# EAGLE board Load_Cape (EAGLE 7.7.0)
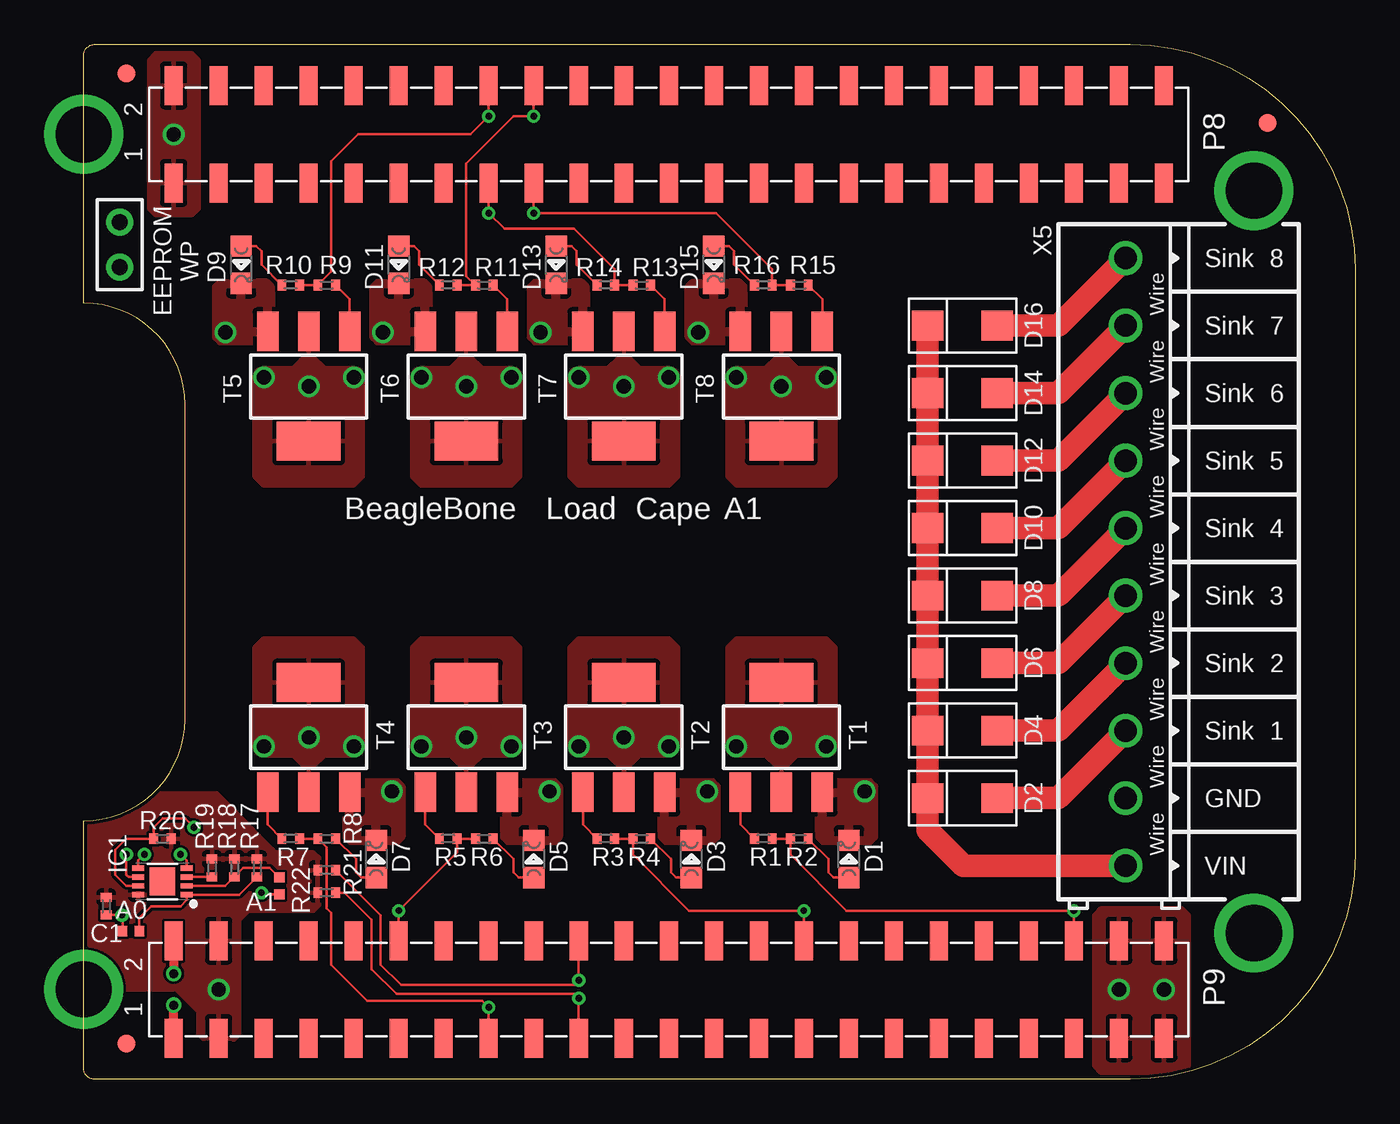
[diagram p0: board, top side]
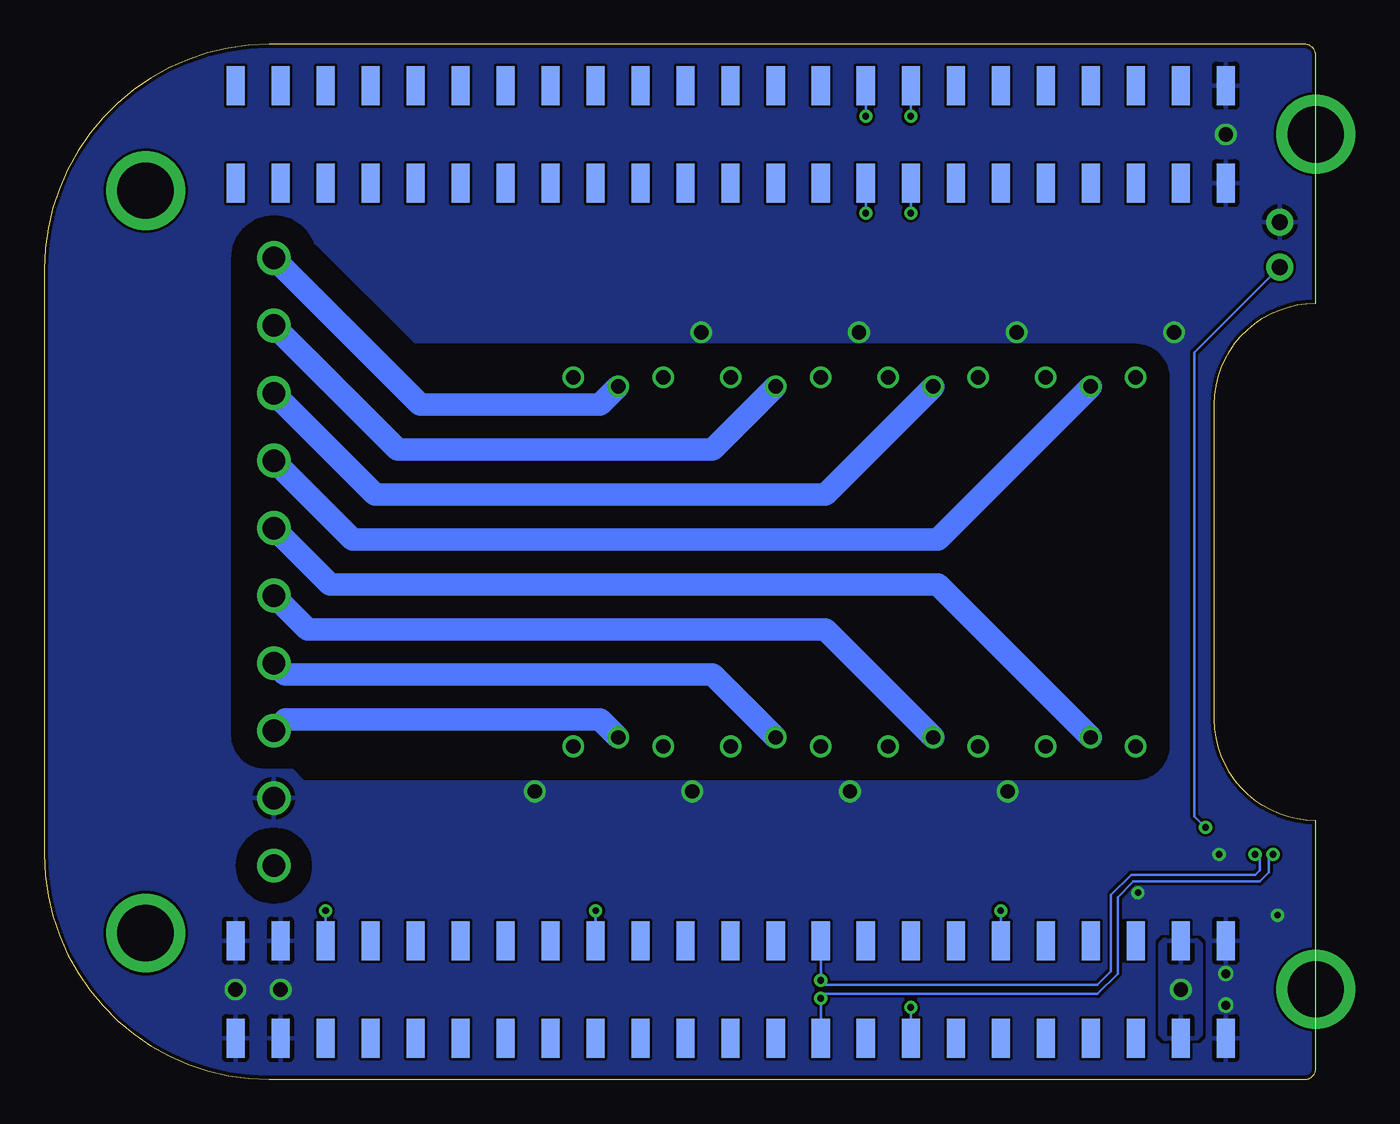
[diagram p1: board, bottom side, seen from below]

Size 71.75 x 58.42 mm. Coordinates in mm from the lower left corner, seen from the top.
Copper layers (1+16): Top 0.035mm / dielectric 1.5mm / Bottom 0.035mm
Design rules "SparkFun-2-layer *": minimum track width 6mil, minimum drill 15mil, track to track 6mil, track to pad 6mil, pad to pad 6mil, via to via 6mil, smd to smd 6mil, copper to edge 8mil, drill to drill 8mil, minimum pad ring 12mil, minimum via ring 7mil, stop-mask expansion 4mil, vias tented up to drill 32mil, thermal gap 10mil
tRestrict: 4 lines

## Footprints (pad centres in the part's own frame; a part is rotated, then mirrored left to right if it is on the bottom)
BEAGLEBONE.CAPE.TOP/BOTTOM-PADS = smd 1.02 x 2.2 bottom: B8.1 5.08,50.59; B8.2 5.08,56.09; B8.3 7.62,50.59; B8.4 7.62,56.09; B8.5 10.16,50.59; B8.6 10.16,56.09; B8.7 12.7,50.59; B8.8 12.7,56.09; B8.9 15.24,50.59; B8.10 15.24,56.09; B8.11 17.78,50.59; B8.12 17.78,56.09; B8.13 20.32,50.59; B8.14 20.32,56.09; B8.15 22.86,50.59; B8.16 22.86,56.09; B8.17 25.4,50.59; B8.18 25.4,56.09; B8.19 27.94,50.59; B8.20 27.94,56.09; B8.21 30.48,50.59; B8.22 30.48,56.09; B8.23 33.02,50.59; B8.24 33.02,56.09; B8.25 35.56,50.59; B8.26 35.56,56.09; B8.27 38.1,50.59; B8.28 38.1,56.09; B8.29 40.64,50.59; B8.30 40.64,56.09; B8.31 43.18,50.59; B8.32 43.18,56.09; B8.33 45.72,50.59; B8.34 45.72,56.09; B8.35 48.26,50.59; B8.36 48.26,56.09; B8.37 50.8,50.59; B8.38 50.8,56.09; B8.39 53.34,50.59; B8.40 53.34,56.09; B8.41 55.88,50.59; B8.42 55.88,56.09; B8.43 58.42,50.59; B8.44 58.42,56.09; B8.45 60.96,50.59; B8.46 60.96,56.09; B9.1 5.08,2.33; B9.2 5.08,7.83; B9.3 7.62,2.33; B9.4 7.62,7.83; B9.5 10.16,2.33; B9.6 10.16,7.83; B9.7 12.7,2.33; B9.8 12.7,7.83; B9.9 15.24,2.33; B9.10 15.24,7.83; B9.11 17.78,2.33; B9.12 17.78,7.83; B9.13 20.32,2.33; B9.14 20.32,7.83; B9.15 22.86,2.33; B9.16 22.86,7.83; B9.17 25.4,2.33; B9.18 25.4,7.83; B9.19 27.94,2.33; B9.20 27.94,7.83; B9.21 30.48,2.33; B9.22 30.48,7.83; B9.23 33.02,2.33; B9.24 33.02,7.83; B9.25 35.56,2.33; B9.26 35.56,7.83; B9.27 38.1,2.33; B9.28 38.1,7.83; B9.29 40.64,2.33; B9.30 40.64,7.83; B9.31 43.18,2.33; B9.32 43.18,7.83; B9.33 45.72,2.33; B9.34 45.72,7.83; B9.35 48.26,2.33; B9.36 48.26,7.83; B9.37 50.8,2.33; B9.38 50.8,7.83; B9.39 53.34,2.33; B9.40 53.34,7.83; B9.41 55.88,2.33; B9.42 55.88,7.83; B9.43 58.42,2.33; B9.44 58.42,7.83; B9.45 60.96,2.33; B9.46 60.96,7.83 | drill 3.175 pad 4.445: MH.1 0,5.08; MH.2 66.04,8.255; MH.3 66.04,50.165; MH.4 0,53.34 | smd 1.02 x 2.2: T8.1 5.08,50.59; T8.2 5.08,56.09; T8.3 7.62,50.59; T8.4 7.62,56.09; T8.5 10.16,50.59; T8.6 10.16,56.09; T8.7 12.7,50.59; T8.8 12.7,56.09; T8.9 15.24,50.59; T8.10 15.24,56.09; T8.11 17.78,50.59; T8.12 17.78,56.09; T8.13 20.32,50.59; T8.14 20.32,56.09; T8.15 22.86,50.59; T8.16 22.86,56.09; T8.17 25.4,50.59; T8.18 25.4,56.09; T8.19 27.94,50.59; T8.20 27.94,56.09; T8.21 30.48,50.59; T8.22 30.48,56.09; T8.23 33.02,50.59; T8.24 33.02,56.09; T8.25 35.56,50.59; T8.26 35.56,56.09; T8.27 38.1,50.59; T8.28 38.1,56.09; T8.29 40.64,50.59; T8.30 40.64,56.09; T8.31 43.18,50.59; T8.32 43.18,56.09; T8.33 45.72,50.59; T8.34 45.72,56.09; T8.35 48.26,50.59; T8.36 48.26,56.09; T8.37 50.8,50.59; T8.38 50.8,56.09; T8.39 53.34,50.59; T8.40 53.34,56.09; T8.41 55.88,50.59; T8.42 55.88,56.09; T8.43 58.42,50.59; T8.44 58.42,56.09; T8.45 60.96,50.59; T8.46 60.96,56.09; T9.1 5.08,2.33; T9.2 5.08,7.83; T9.3 7.62,2.33; T9.4 7.62,7.83; T9.5 10.16,2.33; T9.6 10.16,7.83; T9.7 12.7,2.33; T9.8 12.7,7.83; T9.9 15.24,2.33; T9.10 15.24,7.83; T9.11 17.78,2.33; T9.12 17.78,7.83; T9.13 20.32,2.33; T9.14 20.32,7.83; T9.15 22.86,2.33; T9.16 22.86,7.83; T9.17 25.4,2.33; T9.18 25.4,7.83; T9.19 27.94,2.33; T9.20 27.94,7.83; T9.21 30.48,2.33; T9.22 30.48,7.83; T9.23 33.02,2.33; T9.24 33.02,7.83; T9.25 35.56,2.33; T9.26 35.56,7.83; T9.27 38.1,2.33; T9.28 38.1,7.83; T9.29 40.64,2.33; T9.30 40.64,7.83; T9.31 43.18,2.33; T9.32 43.18,7.83; T9.33 45.72,2.33; T9.34 45.72,7.83; T9.35 48.26,2.33; T9.36 48.26,7.83; T9.37 50.8,2.33; T9.38 50.8,7.83; T9.39 53.34,2.33; T9.40 53.34,7.83; T9.41 55.88,2.33; T9.42 55.88,7.83; T9.43 58.42,2.33; T9.44 58.42,7.83; T9.45 60.96,2.33; T9.46 60.96,7.83
0402 = smd 0.5 x 0.6: 1 -0.5,0; 2 0.5,0
0805-LED = smd 1.2 x 1.2: A 0,1.05; K 0,-1.05
DIODE_SMA = smd 1.778 x 1.676: A -1.905,0; K 2.032,0
FIDUCIAL_40MIL = smd 1.016 x 1.016: P$1 0,0
UDFN8,2X3(ON-SEMI) = smd 0.3 x 0.68: 1 0.75,1.36; 2 0.25,1.36; 3 -0.25,1.36; 4 -0.75,1.36; 5 -0.75,-1.36; 6 -0.25,-1.36; 7 0.25,-1.36; 8 0.75,-1.36 | smd 1.56 x 1.45: P$1 0,0
JUMPER-(X2) = drill 0.889 pad 1.524: 1 -1.27,0; 2 1.27,0
SOLDER.JOINT(0402) = smd 0.55 x 0.6: 1 -0.475,0; 2 0.475,0
SOT223 = smd 1.219 x 2.235: 1 -2.311,-3.099; 2 0,-3.099; 3 2.311,-3.099 | smd 3.6 x 2.2: 4 0,3.099
TERMINAL.BLOCK-10TERM-150MIL.PITCH = drill 1.27 pad 1.905: 1 -17.145,0; 2 -13.335,0; 3 -9.525,0; 4 -5.715,0; 5 -1.905,0; 6 1.905,0; 7 5.715,0; 8 9.525,0; 9 13.335,0; 10 17.145,0

## Placement (x,y rotation side)
BB.CAPE1  BEAGLEBONE.CAPE.TOP/BOTTOM-PADS  [BEAGLEBONE.CAPE.TOP/BOTTOM-PADS]  0,0 0 top
C1  [0402]  1.27,9.78 270 top
D1  [0805-LED]  43.18,12.45 180 top
D2  STPS140A  [DIODE_SMA]  49.66,15.88 180 top
D3  [0805-LED]  34.29,12.45 180 top
D4  STPS140A  [DIODE_SMA]  49.66,19.68 180 top
D5  [0805-LED]  25.4,12.45 180 top
D6  STPS140A  [DIODE_SMA]  49.66,23.5 180 top
D7  [0805-LED]  16.51,12.45 180 top
D8  STPS140A  [DIODE_SMA]  49.66,27.3 180 top
D9  [0805-LED]  8.89,45.97 0 top
D10  STPS140A  [DIODE_SMA]  49.66,31.11 180 top
D11  [0805-LED]  17.78,45.97 0 top
D12  STPS140A  [DIODE_SMA]  49.66,34.92 180 top
D13  [0805-LED]  26.67,45.97 0 top
D14  STPS140A  [DIODE_SMA]  49.66,38.73 180 top
D15  [0805-LED]  35.56,45.97 0 top
D16  STPS140A  [DIODE_SMA]  49.66,42.55 180 top
FUD1  FIDUCIAL  [FIDUCIAL_40MIL]  2.41,2.03 0 top
FUD2  FIDUCIAL  [FIDUCIAL_40MIL]  66.8,53.98 0 top
FUD3  FIDUCIAL  [FIDUCIAL_40MIL]  2.41,56.77 0 top
IC1  [UDFN8,2X3(ON-SEMI)]  4.45,11.18 270 top
JMP1  JUMPER-(X2)  [JUMPER-(X2)]  2.03,47.12 90 top
R1  330  [0402]  38.35,13.59 180 top
R2  1k  [0402]  40.39,13.59 0 top
R3  330  [0402]  29.46,13.59 180 top
R4  1k  [0402]  31.5,13.59 0 top
R5  330  [0402]  20.57,13.59 180 top
R6  1k  [0402]  22.61,13.59 0 top
R7  330  [0402]  11.68,13.59 180 top
R8  1k  [0402]  13.72,13.59 0 top
R9  330  [0402]  13.72,44.83 0 top
R10  1k  [0402]  11.68,44.83 180 top
R11  330  [0402]  22.61,44.83 0 top
R12  1k  [0402]  20.57,44.83 180 top
R13  330  [0402]  31.5,44.83 0 top
R14  1k  [0402]  29.46,44.83 180 top
R15  330  [0402]  40.39,44.83 0 top
R16  1k  [0402]  38.35,44.83 180 top
R17  1k  [0402]  9.78,11.94 270 top
R18  1k  [0402]  8.51,11.94 270 top
R19  1k  [0402]  7.24,11.94 270 top
R20  1k  [0402]  4.45,13.59 0 top
R21  DNP(2.2k)  [0402]  13.72,11.81 180 top
R22  DNP(2.2k)  [0402]  13.72,10.54 180 top
SJ1  [SOLDER.JOINT(0402)]  2.67,8.38 0 top
SJ2  [SOLDER.JOINT(0402)]  11.05,10.92 90 top
T1  PBSS4350Z 50V 3A  [SOT223]  39.37,19.3 0 top
T2  PBSS4350Z 50V 3A  [SOT223]  30.48,19.3 0 top
T3  PBSS4350Z 50V 3A  [SOT223]  21.59,19.3 0 top
T4  PBSS4350Z 50V 3A  [SOT223]  12.7,19.3 0 top
T5  PBSS4350Z 50V 3A  [SOT223]  12.7,39.12 180 top
T6  PBSS4350Z 50V 3A  [SOT223]  21.59,39.12 180 top
T7  PBSS4350Z 50V 3A  [SOT223]  30.48,39.12 180 top
T8  PBSS4350Z 50V 3A  [SOT223]  39.37,39.12 180 top
X5  [TERMINAL.BLOCK-10TERM-150MIL.PITCH]  58.8,29.21 270 top

## Library data of the parts
BB.CAPE1 = GHI-Solutions
C1 D1 D3 D5 D7 D9 D11 D13 D15 R1-R22 = GHI-BasicComponents
D2 D4 D6 D8 D10 D12 D14 D16 FUD1-FUD3 = GHI
IC1 = GHI-IC
JMP1 = GHI-Headers
SJ1 SJ2 = GHI-Miscellaneous
T1-T8 = GHI-Transistors
X5 = GHI-Connectors

## Nets
A0: IC1.1 R17.2 SJ1.2
A1: IC1.2 R18.2 SJ2.2
A2: IC1.3 R19.2
GND: BB.CAPE1.B8.1 BB.CAPE1.B8.2 BB.CAPE1.B9.1 BB.CAPE1.B9.2 BB.CAPE1.B9.43 BB.CAPE1.B9.44 BB.CAPE1.B9.45 BB.CAPE1.B9.46 BB.CAPE1.T8.1 BB.CAPE1.T8.2 BB.CAPE1.T9.1 BB.CAPE1.T9.2 BB.CAPE1.T9.43 BB.CAPE1.T9.44 BB.CAPE1.T9.45 BB.CAPE1.T9.46 C1.2 D1.K D3.K D5.K D7.K D9.K D11.K D13.K D15.K IC1.4 JMP1.2 SJ1.1 SJ2.1 T1.3 T2.3 T3.3 T4.3 T5.3 T6.3 T7.3 T8.3 X5.9
N$3: D13.A R14.2
N$4: R13.2 T7.1
N$5: D11.A R12.2
N$6: R11.2 T6.1
N$7: D9.A R10.2
N$8: R9.2 T5.1
N$9: D7.A R8.2
N$10: R7.2 T4.1
N$11: D5.A R6.2
N$12: R5.2 T3.1
N$13: D3.A R4.2
N$35: R3.2 T2.1
N$36: D1.A R2.2
N$37: R1.2 T1.1
N$38: D15.A R16.2
N$39: R15.2 T8.1
SCL: BB.CAPE1.B9.19 BB.CAPE1.T9.19 IC1.6 R22.1
SDA: BB.CAPE1.B9.20 BB.CAPE1.T9.20 IC1.5 R21.1
SINK1: BB.CAPE1.B9.42 BB.CAPE1.T9.42 R1.1 R2.1
SINK1.TB: D2.A T1.2 T1.4 X5.8
SINK2: BB.CAPE1.B9.30 BB.CAPE1.T9.30 R3.1 R4.1
SINK2.TB: D4.A T2.2 T2.4 X5.7
SINK3: BB.CAPE1.B9.12 BB.CAPE1.T9.12 R5.1 R6.1
SINK3.TB: D6.A T3.2 T3.4 X5.6
SINK4: BB.CAPE1.B9.15 BB.CAPE1.T9.15 R7.1 R8.1
SINK4.TB: D8.A T4.2 T4.4 X5.5
SINK5: BB.CAPE1.B8.16 BB.CAPE1.T8.16 R9.1 R10.1
SINK5.TB: D10.A T5.2 T5.4 X5.4
SINK6: BB.CAPE1.B8.18 BB.CAPE1.T8.18 R11.1 R12.1
SINK6.TB: D12.A T6.2 T6.4 X5.3
SINK7: BB.CAPE1.B8.15 BB.CAPE1.T8.15 R13.1 R14.1
SINK7.TB: D14.A T7.2 T7.4 X5.2
SINK8: BB.CAPE1.B8.17 BB.CAPE1.T8.17 R15.1 R16.1
SINK8.TB: D16.A T8.2 T8.4 X5.1
VCC: BB.CAPE1.B9.3 BB.CAPE1.B9.4 BB.CAPE1.T9.3 BB.CAPE1.T9.4 C1.1 IC1.8 R17.1 R18.1 R19.1 R20.2 R21.2 R22.2
VIN: D2.K D4.K D6.K D8.K D10.K D12.K D14.K D16.K X5.10
WP: IC1.7 JMP1.1 R20.1

## Tracks (layer width: path | path; a pad name or v marks a point on that pad's centre or on a via)
A0
  Top 0.152: R17.2 8.77,10.43 IC1.1 5.8,10.12 5.46,9.78 3.81,9.78 3.14,9.11 SJ1.2
A1
  Top 0.152: IC1.2 8,10.93 R18.2 9.01,11.94 10.51,11.94 SJ2.2
A2
  Top 0.152: IC1.3 7.23,11.43 R19.2
GND  (via drill 0.38 pad 0.18, 0.51 pad 0.18, 0.81 pad 0.18)
  Top 0.152: SJ2.1 10.13,10.45 v10.03,10.54 | SJ1.1 2.19,9.24 v2.16,9.27 v2.15,9.28 C1.2 | IC1.4 5.8,12.36 v5.46,12.7
  Top 0.508: BB.CAPE1.T9.2 v5.08,5.97 | BB.CAPE1.T9.1 v5.08,4.19
  other vias: 44.07,16.26 35.18,16.26 26.29,16.26 17.4,16.26 8,42.16 16.89,42.16 25.78,42.16 34.67,42.16 58.42,5.08 60.96,5.08 5.08,53.34
  pour Bottom (rank 2): 72.39,59.05 -0.64,59.05 -0.64,-0.64 72.39,-0.64
  pour Top: 41.53,16.76 44.32,16.76 44.58,16.51 44.58,13.72 44.32,13.46 41.78,13.46 41.53,13.72
  pour Top: 32.64,16.76 35.43,16.76 35.69,16.51 35.69,13.72 35.43,13.46 32.89,13.46 32.64,13.72
  pour Top: 23.75,16.76 26.54,16.76 26.8,16.51 26.8,13.72 26.54,13.46 24,13.46 23.75,13.72
  pour Top: 14.86,16.76 17.65,16.76 17.91,16.51 17.91,13.72 17.65,13.46 15.11,13.46 14.86,13.72
  pour Top: 10.54,41.66 7.75,41.66 7.49,41.91 7.49,44.7 7.75,44.96 10.29,44.96 10.54,44.7
  pour Top: 19.43,41.66 16.64,41.66 16.38,41.91 16.38,44.7 16.64,44.96 19.18,44.96 19.43,44.7
  pour Top: 28.32,41.66 25.53,41.66 25.27,41.91 25.27,44.7 25.53,44.96 28.07,44.96 28.32,44.7
  pour Top: 37.21,41.66 34.42,41.66 34.16,41.91 34.16,44.7 34.42,44.96 36.96,44.96 37.21,44.7
  pour Top: 61.98,9.65 57.4,9.65 57.02,9.27 57.02,0.76 57.4,0.38 61.98,0.38 62.36,0.76 62.36,9.27
  pour Top: 4.06,57.91 6.1,57.91 6.48,57.53 6.48,49.15 6.1,48.77 4.06,48.77 3.68,49.15 3.68,57.53
N$3
  Top 0.152: R14.2 27.81,45.98 27.81,46.74 27.52,47.02 D13.A
N$4
  Top 0.152: T7.1 32.79,44.04 R13.2
N$5
  Top 0.152: R12.2 18.92,45.98 18.92,46.74 18.64,47.02 D11.A
N$6
  Top 0.152: T6.1 23.9,44.04 R11.2
N$7
  Top 0.152: R10.2 10.03,45.98 10.03,46.74 9.74,47.02 D9.A
N$8
  Top 0.152: T5.1 15.01,44.04 R9.2
N$9
  Top 0.152: R8.2 15.37,12.44 15.37,11.68 15.65,11.4 D7.A
N$10
  Top 0.152: T4.1 10.39,14.38 R7.2
N$11
  Top 0.152: R6.2 24.26,12.44 24.26,11.68 24.55,11.4 D5.A
N$12
  Top 0.152: T3.1 19.28,14.38 R5.2
N$13
  Top 0.152: R4.2 33.15,12.44 33.15,11.68 33.44,11.4 D3.A
N$35
  Top 0.152: T2.1 28.17,14.38 R3.2
N$36
  Top 0.152: R2.2 42.04,12.44 42.04,11.68 42.33,11.4 D1.A
N$37
  Top 0.152: T1.1 37.06,14.38 R1.2
N$38
  Top 0.152: R16.2 36.7,45.98 36.7,46.74 36.41,47.02 D15.A
N$39
  Top 0.152: T8.1 41.68,44.04 R15.2
N$40
  cutout Bottom: 8.38,18.8 8.38,39.62 arc-90 10.16,41.4 50.93,41.4 56.52,46.99 56.52,46.35 arc-90 58.8,48.64 arc-90 61.09,46.35 61.09,19.43 arc-90 59.31,17.65 57.66,17.65 57.02,17.02 10.16,17.02 arc-90
N$41
  cutout Bottom: 58.8,10.03 arc-90 56.77,12.06 arc-90 58.8,14.1 arc-90 60.83,12.06 arc-90
SCL  (via drill 0.38 pad 0.18)
  Top 0.152: IC1.6 2.54,11.43 2.41,11.56 v2.41,12.7 | R22.1 14.73,10.54 16.26,9.02 16.26,6.22 17.65,4.83 27.69,4.83 v27.94,4.57 BB.CAPE1.T9.19
  Bottom 0.152: v2.41,12.7 2.67,12.45 2.67,11.68 3.17,11.18 10.29,11.18 11.18,10.29 11.18,5.97 12.32,4.83 27.69,4.83 v27.94,4.57 BB.CAPE1.T9.19
SDA  (via drill 0.38 pad 0.18)
  Top 0.152: IC1.5 3.08,12.36 v3.43,12.7 | R21.1 16.76,9.26 16.76,6.48 17.91,5.33 27.69,5.33 v27.94,5.59 BB.CAPE1.T9.20
  Bottom 0.152: v3.43,12.7 3.17,12.45 3.17,11.81 3.43,11.56 10.41,11.56 11.56,10.41 11.56,6.1 12.32,5.33 27.69,5.33 v27.94,5.59 BB.CAPE1.T9.20
SINK1  (via drill 0.38 pad 0.18)
  Top 0.152: R1.1 R2.1 39.89,12.69 43.05,9.53 v55.88,9.53 BB.CAPE1.T9.42
  Bottom 0.152: BB.CAPE1.T9.42 v55.88,9.53
SINK1.TB  (via drill 0.81 pad 0.18)
  Top 1.27: X5.8 54.99,15.88 D2.A
  Bottom 1.27: X5.8 58.17,20.32 40.39,20.32 v39.37,19.3
  other vias: 41.91,18.8 36.83,18.8
  pour Top: 40.26,18.29 41.91,18.29 arc90 42.42,18.8 42.42,24.38 41.91,24.89 36.83,24.89 36.32,24.38 36.32,18.8 arc90 36.83,18.29 38.48,18.29 39.12,17.65 39.12,15.37 39.62,15.37 39.62,17.65
SINK2  (via drill 0.38 pad 0.18)
  Top 0.152: R3.1 R4.1 31,12.69 34.16,9.53 v40.64,9.53 BB.CAPE1.T9.30
  Bottom 0.152: BB.CAPE1.T9.30 v40.64,9.53
SINK2.TB  (via drill 0.81 pad 0.18)
  Top 1.27: X5.7 54.99,19.68 D4.A
  Bottom 1.27: X5.7 58.17,22.86 34.04,22.86 v30.48,19.3
  other vias: 33.02,18.8 27.94,18.8
  pour Top: 31.37,18.29 33.02,18.29 arc90 33.53,18.8 33.53,24.38 33.02,24.89 27.94,24.89 27.43,24.38 27.43,18.8 arc90 27.94,18.29 29.59,18.29 30.23,17.65 30.23,15.37 30.73,15.37 30.73,17.65
SINK3  (via drill 0.38 pad 0.18)
  Top 0.152: R6.1 R5.1 21.07,12.82 v17.78,9.53 BB.CAPE1.B9.12
  Bottom 0.152: BB.CAPE1.B9.12 v17.78,9.53
SINK3.TB  (via drill 0.81 pad 0.18)
  Top 1.27: X5.6 54.99,23.5 D6.A
  Bottom 1.27: X5.6 56.9,25.4 27.69,25.4 v21.59,19.3
  other vias: 24.13,18.8 19.05,18.8
  pour Top: 22.48,18.29 24.13,18.29 arc90 24.64,18.8 24.64,24.38 24.13,24.89 19.05,24.89 18.54,24.38 18.54,18.8 arc90 19.05,18.29 20.7,18.29 21.34,17.65 21.34,15.37 21.84,15.37 21.84,17.65
SINK4  (via drill 0.38 pad 0.18)
  Top 0.152: R7.1 R8.1 13.72,13.09 13.72,9.65 13.97,9.4 13.97,6.48 16,4.45 22.48,4.45 v22.86,4.06 BB.CAPE1.T9.15
  Bottom 0.152: BB.CAPE1.T9.15 v22.86,4.06
SINK4.TB  (via drill 0.81 pad 0.18)
  Top 1.27: X5.5 54.99,27.3 D8.A
  Bottom 1.27: X5.5 55.63,27.94 21.34,27.94 v12.7,19.3
  other vias: 10.16,18.8 15.24,18.8
  pour Top: 13.59,18.29 15.24,18.29 arc90 15.75,18.8 15.75,24.38 15.24,24.89 10.16,24.89 9.65,24.38 9.65,18.8 arc90 10.16,18.29 11.81,18.29 12.45,17.65 12.45,15.37 12.95,15.37 12.95,17.65
SINK5  (via drill 0.38 pad 0.18)
  Top 0.152: R10.1 R9.1 13.97,45.59 13.97,51.82 15.49,53.34 21.84,53.34 v22.86,54.36 BB.CAPE1.T8.16
  Bottom 0.152: v22.86,54.36 BB.CAPE1.T8.16
SINK5.TB  (via drill 0.81 pad 0.18)
  Top 1.27: X5.4 54.99,31.11 D10.A
  Bottom 1.27: X5.4 54.36,30.48 21.34,30.48 v12.7,39.12
  other vias: 10.16,39.62 15.24,39.62
  pour Top: 11.81,40.13 10.16,40.13 arc90 9.65,39.62 9.65,34.04 10.16,33.53 15.24,33.53 15.75,34.04 15.75,39.62 arc90 15.24,40.13 13.59,40.13 12.95,40.77 12.95,43.05 12.45,43.05 12.45,40.77
SINK6  (via drill 0.38 pad 0.18)
  Top 0.152: R12.1 R11.1 21.59,45.35 21.59,51.69 24.26,54.36 v25.4,54.36 BB.CAPE1.B8.18
  Bottom 0.152: v25.4,54.36 BB.CAPE1.B8.18
SINK6.TB  (via drill 0.81 pad 0.18)
  Top 1.27: X5.3 54.99,34.92 D12.A
  Bottom 1.27: X5.3 53.09,33.02 27.69,33.02 v21.59,39.12
  other vias: 24.13,39.62 19.05,39.62
  pour Top: 20.7,40.13 19.05,40.13 arc90 18.54,39.62 18.54,34.04 19.05,33.53 24.13,33.53 24.64,34.04 24.64,39.62 arc90 24.13,40.13 22.48,40.13 21.84,40.77 21.84,43.05 21.34,43.05 21.34,40.77
SINK7  (via drill 0.38 pad 0.18)
  Top 0.152: R13.1 R14.1 29.96,45.73 27.69,48.01 23.75,48.01 v22.86,48.9 BB.CAPE1.T8.15
  Bottom 0.152: v22.86,48.9 BB.CAPE1.T8.15
SINK7.TB  (via drill 0.81 pad 0.18)
  Top 1.27: D14.A 54.99,38.73 X5.2
  Bottom 1.27: v30.48,39.12 34.04,35.56 51.82,35.56 X5.2
  other vias: 33.02,39.62 27.94,39.62
  pour Top: 29.59,40.13 27.94,40.13 arc90 27.43,39.62 27.43,34.04 27.94,33.53 33.02,33.53 33.53,34.04 33.53,39.62 arc90 33.02,40.13 31.37,40.13 30.73,40.77 30.73,43.05 30.23,43.05 30.23,40.77
SINK8  (via drill 0.38 pad 0.18)
  Top 0.152: R15.1 R16.1 38.85,45.73 35.69,48.9 v25.4,48.9 BB.CAPE1.B8.17
  Bottom 0.152: v25.4,48.9 BB.CAPE1.B8.17
SINK8.TB  (via drill 0.81 pad 0.18)
  Top 1.27: X5.1 54.99,42.55 D16.A
  Bottom 1.27: X5.1 50.55,38.1 40.39,38.1 v39.37,39.12
  other vias: 36.83,39.62 41.91,39.62
  pour Top: 38.48,40.13 36.83,40.13 arc90 36.32,39.62 36.32,34.04 36.83,33.53 41.91,33.53 42.42,34.04 42.42,39.62 arc90 41.91,40.13 40.26,40.13 39.62,40.77 39.62,43.05 39.12,43.05 39.12,40.77
VCC  (via drill 0.81 pad 0.18)
  other vias: 7.62,5.08
  pour Bottom: 8.26,8.13 6.99,8.13 6.48,7.62 6.48,2.54 6.99,2.03 8.26,2.03 8.76,2.54 8.76,7.62
  pour Top: 6.99,2.03 8.26,2.03 8.76,2.54 8.76,9.02 9.27,9.53 12.95,9.53 13.34,9.91 13.34,12.45 12.95,12.83 10.79,12.83 7.49,16.13 -0.38,16.13 -0.38,5.08 5.21,5.08 6.48,3.81 6.48,2.54
VIN
  Top 1.27: X5.10 49.66,12.06 47.62,14.1 D2.K D4.K D6.K D8.K D10.K D12.K D14.K D16.K
WP  (via drill 0.38 pad 0.18)
  Top 0.152: IC1.7 2.41,10.93 1.78,11.56 1.78,12.95 2.41,13.59 R20.1 3.94,14.23 4.45,14.73 5.71,14.73 v6.22,14.22
  Bottom 0.152: v6.22,14.22 6.86,14.86 6.86,41.02 JMP1.1

## Text on the board
tPlace: EEPROM / WP | Sink | 8 | Sink | 7 | Sink | 6 | Sink | 5 | BeagleBone | Load | Cape | A1 | Sink | 4 | Sink | 3 | Sink | 2 | Sink | 1 | GND | VIN | A0 | A1